# Altium PCB PCB1.PcbDoc
Units mil, origin at the board's own origin, x right, y up, seen from the top; angles counter-clockwise.
Board outline 1440 x 1160 mil, 2 copper layers (Top Layer, Bottom Layer); 43 components, 34 nets, 175 pads, 37 vias.
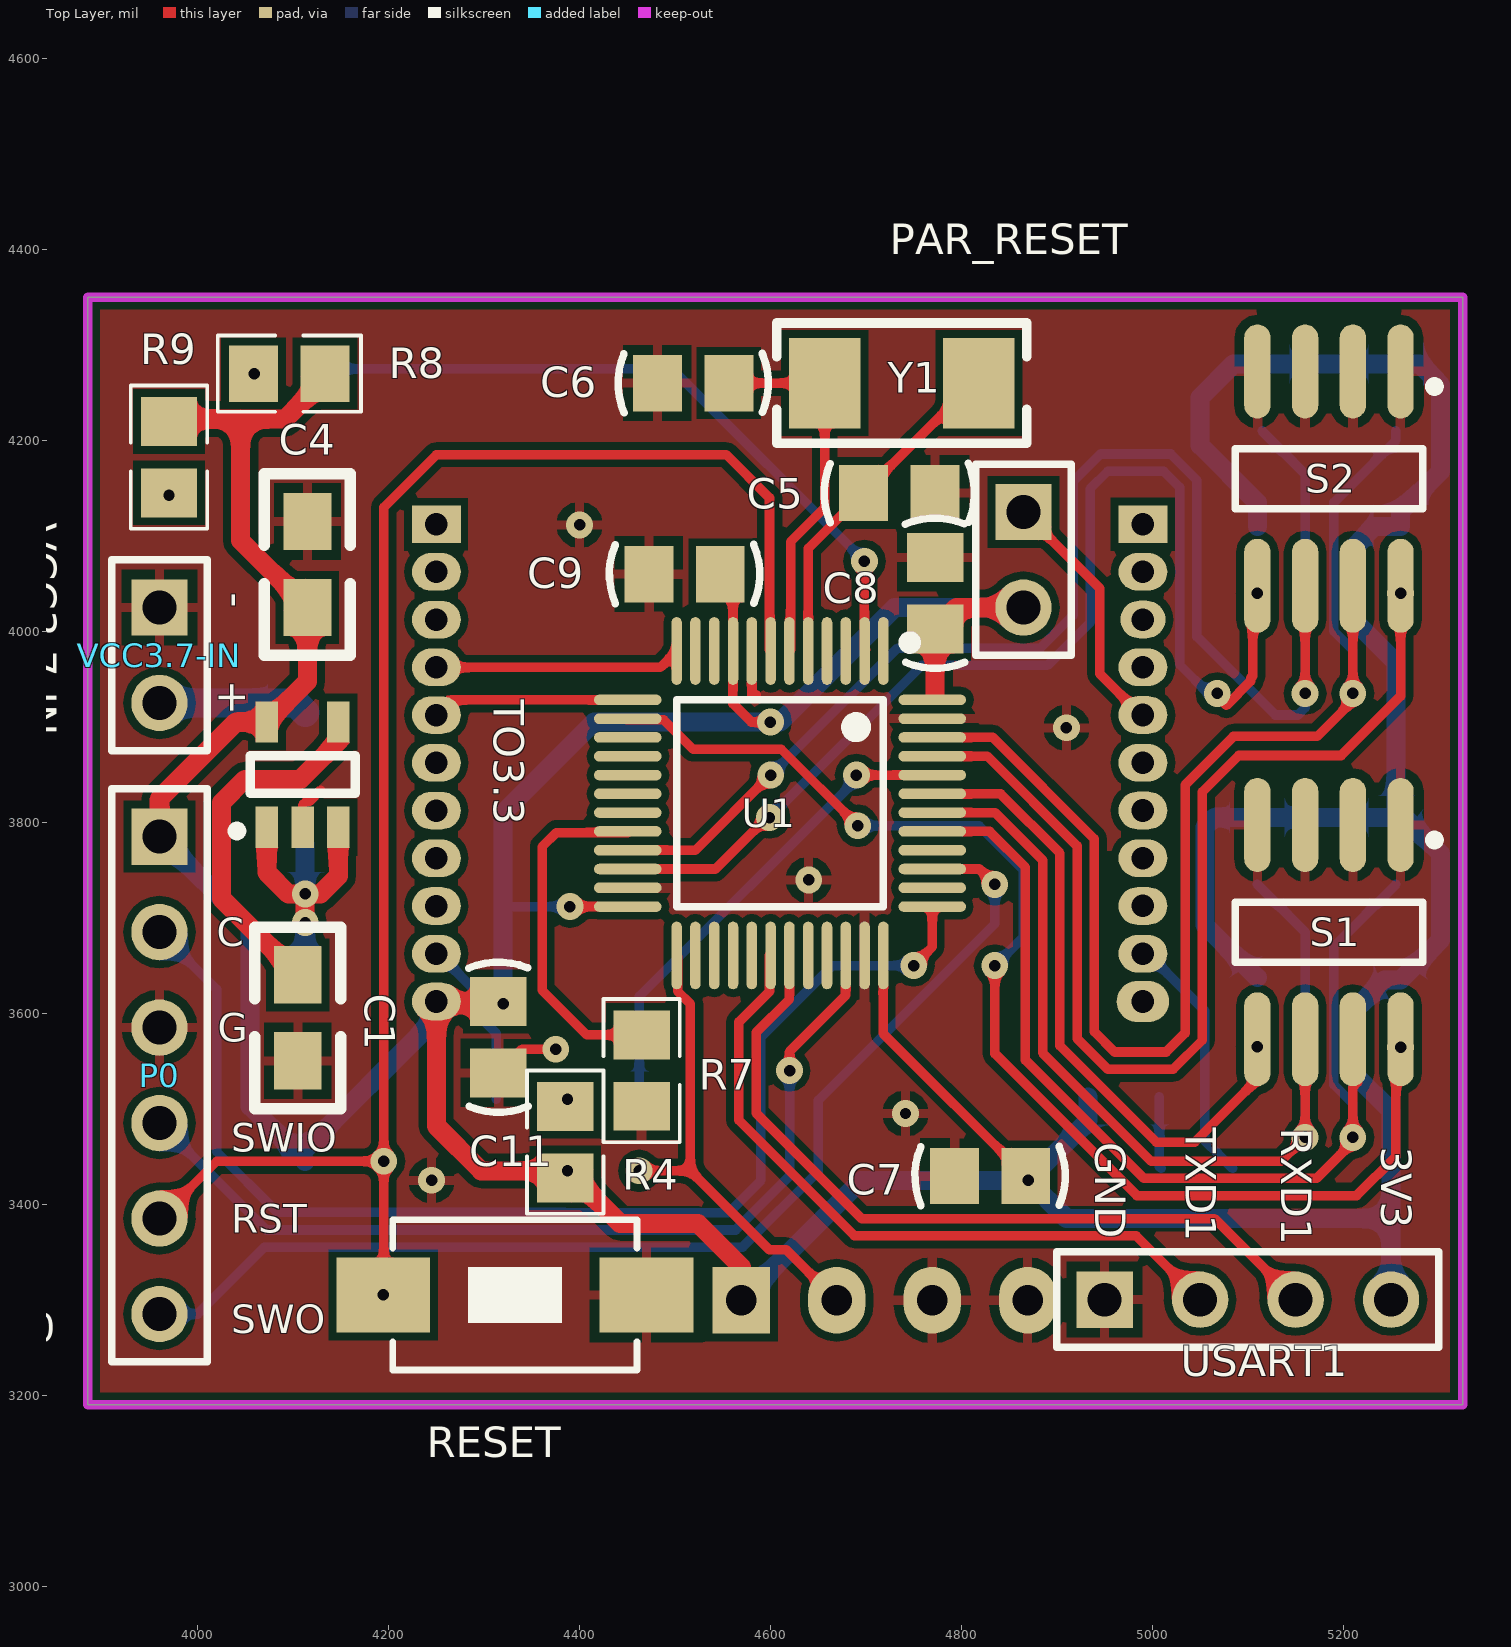
[diagram p0: Top Layer view]
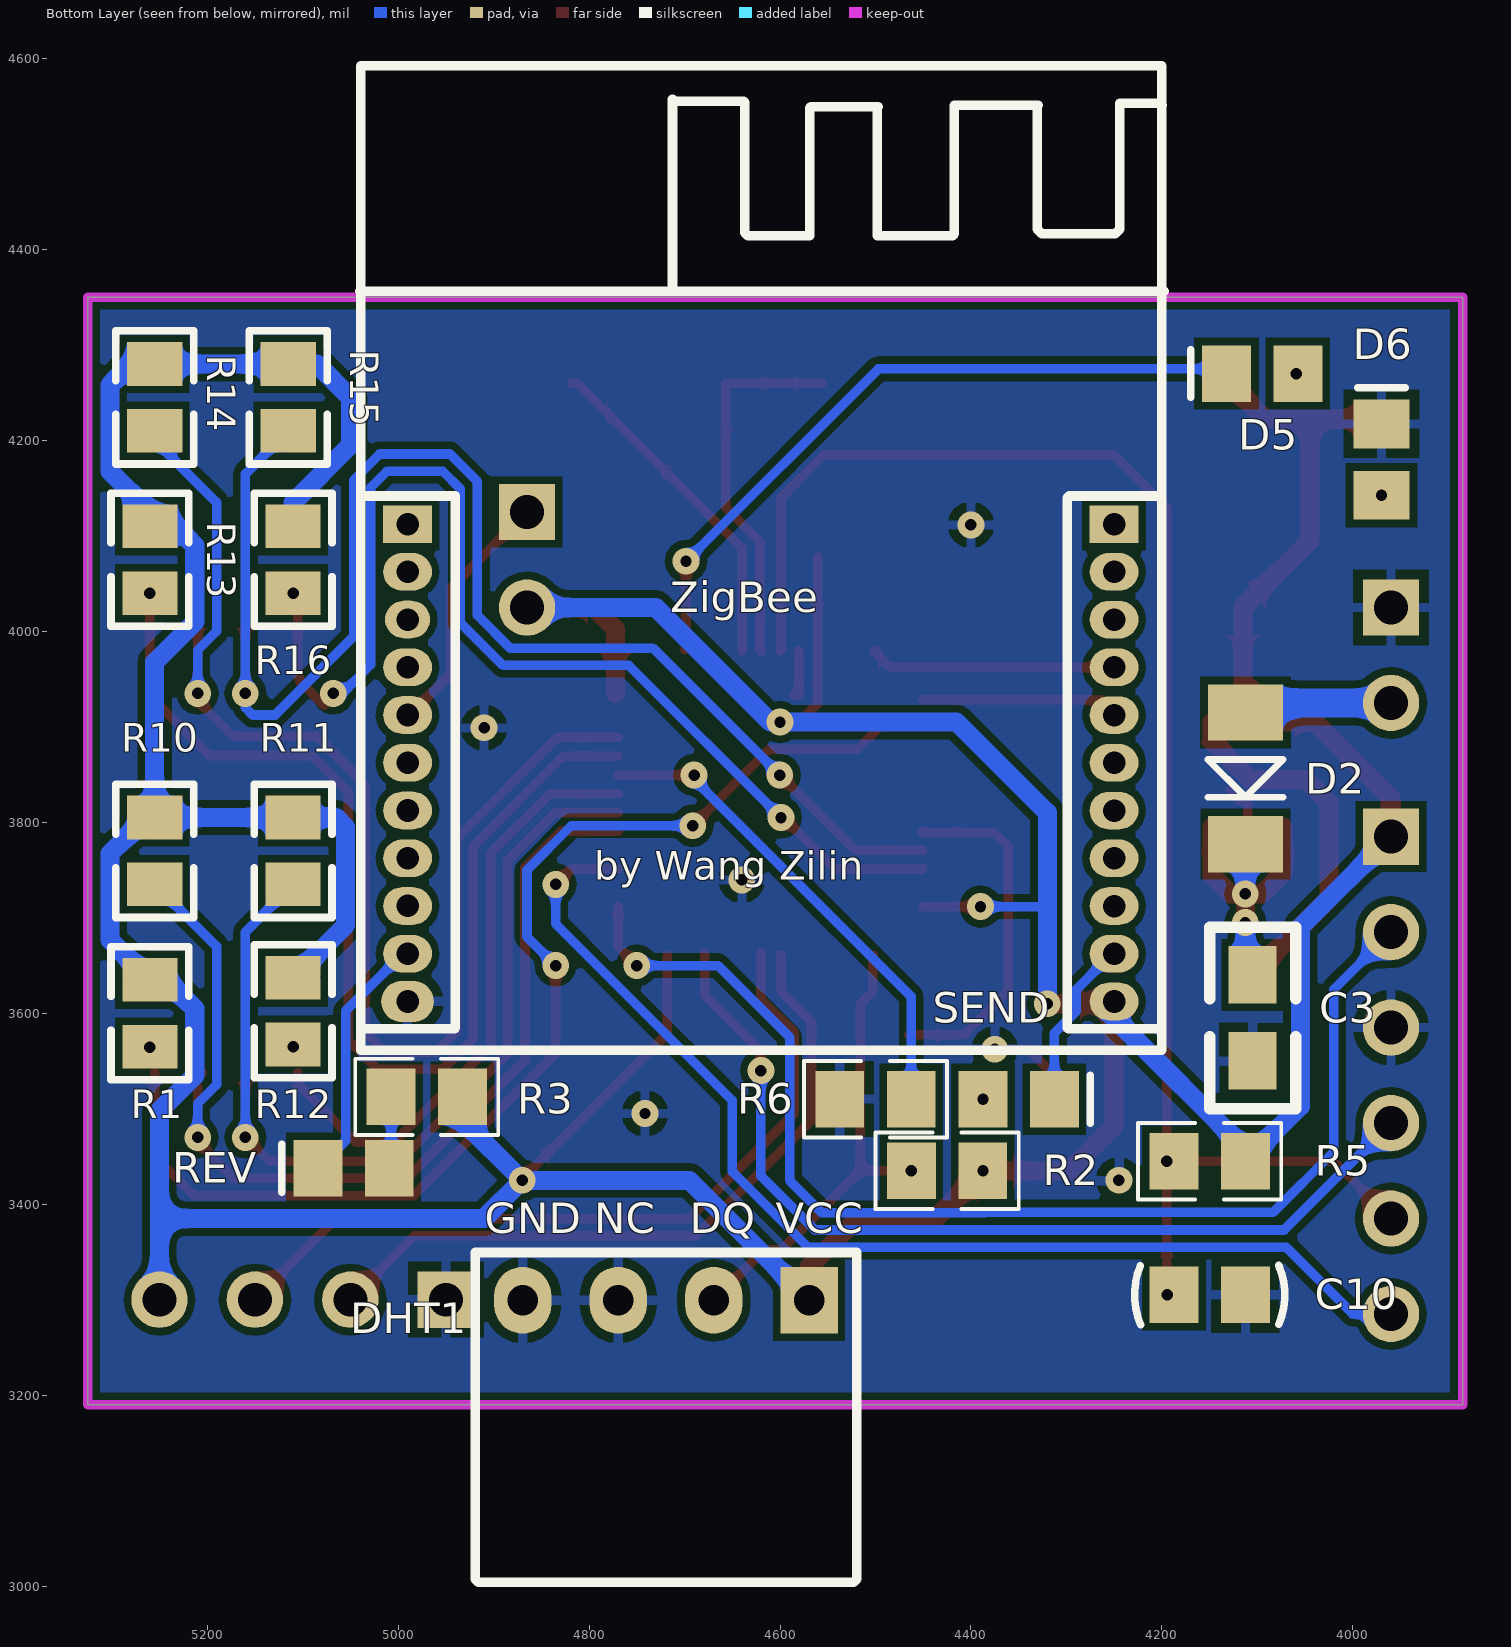
[diagram p1: Bottom Layer view, seen from below]

## Layer stack, top to bottom
Top Solder: solder mask 0.4, Solder Resist, Dk 3.5
Top Layer: signal copper 1.4
Dielectric 1: dielectric 12.6, FR-4, Dk 4.8
Bottom Layer: signal copper 1.4
Bottom Solder: solder mask 0.4, Solder Resist, Dk 3.5

## Board outline
3885,3190 3885,4350 5325,4350 5325,3190

## Design rules (kind name [scope] priority, off if disabled: settings)
Clearance [All] p1: gap=8 ignorepadtopadclearanceinfootprint=TRUE
PolygonConnect [All] p1: connectstyle=Relief reliefconductorwidth=10 reliefentries=4 polygonreliefangle="90 Angle" airgapwidth=10
RoutingVias [All] p1: holewidth=28 width=50 viastyle="Through Hole" minholewidth=28 minwidth=50 maxholewidth=28 maxwidth=50
SolderMaskExpansion [All] p1: expansion=4
Width [All] p1: maxlimit=50 minlimit=10 preferedwidth=10
30 further rules are at their usual default settings.

## Components (designator, comment, footprint, x,y, rotation, side; value= is the part's Value field where it differs from the comment)
C1 "22nF" 0805 4104.94,3550.21 r90 top
C3 "106" 0805 4104.94,3640.21 r270 bottom
C4 "106" 0805 4115.06,4115 r270 top
C5 "Cap" C-RAD-0805 4735,4145 r180 top value=22p
C6 "Cap" C-RAD-0805 4519.02,4260 r0 top value=22p
C7 "Cap" C-RAD-0805 4830,3429.54 r180 top value=104
C8 "Cap" C-RAD-0805 4772.4,4040 r90 top value=104
C9 "Cap" C-RAD-0805 4510,4060 r180 top value=104
C10 "Cap" C-RAD-0805 4150,3305 r180 bottom value=104
C11 "Cap" C-RAD-0805 4315,3575 r270 top value=104
D2 "Diode" DIODE-1206 4112.6,3915 r270 bottom
D5 "LED0" LED_0805 4095,4270 r0 bottom
D6 "LED0" LED_0805 3970,4180 r90 bottom
DHT1 "DHT11" DTH11 4680.08,3260.04 r270 bottom
P0 "Header 6" HDR1X6 3960,3785 r270 top
PAR_RESET "Header 2" HDR2X1_A 4865,4125 r270 top
R1 "10KΩ (1002) ±1%" 0805_R 5260,3600 r90 bottom
R2 "Res1" 0805-1 4425,3435 r0 bottom value=4.7K
R3 "Res1" 0805-1 4970,3512.4 r0 bottom value=10K
R4 "Res1" 0805-1 4385,3465 r270 top value=10K
R5 "Res1" 0805-1 4150,3445 r180 bottom value=10K
R6 "Res1" 0805-1 4500,3510 r0 bottom value=1K
R7 "Res1" 0805-1 4465,3540 r90 top value=1K
R8 "Res1" 0805-1 4095.98,4270 r180 top value=10K
R9 "Res1" 0805-1 3970,4182.48 r270 top value=10K
R10 "10KΩ (1002) ±1%" 0805_R 5255,3770 r90 bottom
R11 "10KΩ (1002) ±1%" 0805_R 5110,3770 r90 bottom
R12 "10KΩ (1002) ±1%" 0805_R 5110,3602.32 r90 bottom
R13 "10KΩ (1002) ±1%" 0805_R 5260,4075 r90 bottom
R14 "10KΩ (1002) ±1%" 0805_R 5255,4245 r90 bottom
R15 "10KΩ (1002) ±1%" 0805_R 5115,4245 r90 bottom
R16 "10KΩ (1002) ±1%" 0805_R 5110,4075 r90 bottom
RESET "SW-PB" SW_PB2_A1 4330,3305 r270 top
REV "LED0" LED_0805 5046.71,3437.6 r0 bottom
S1 "SW DIP-4" SO8_xl 5185,3685 r270 top
S2 "SW DIP-4" SO8_xl 5185,4160 r270 top
SEND "LED0" LED_0805 4350,3510 r180 bottom
TO3.3 "RT9193-33" LC-SOT-23-5 4110,3850 r270 top
U1 "STM32F103C8T6" LQFP-48_7x7x05P 4610,3820 r180 top
USART1 "Header 4" HDR4X1_A 4950,3300 r0 top
VCC3.7-IN "Header 2" HDR2X1_A 3960,4025 r270 top
Y1 "8MHz ±20ppm 20pF" SMD-5032_2P 4737.6,4260 r0 top
ZigBee "ZigBee XL2530-D01" ZigBeeXL2530-D01 4617.12,3560.11 r180 bottom

## Footprints (in the part's own frame and the unit in brackets; to place one, negate y for a bottom-side part, rotate by r counter-clockwise, add the part's x,y. Pads: shape width x height; smd on the part's side, far side on the other; paste and mask are expansions set on the pad)
0805 [mil]
  rect 60x50 smd: 1(0,-0.06) 2(90,-0.06)
  silkscreen extent -50,-45 140,45
0805-1 [mm] "贴片带丝印"
  rect 1.3x1.5 smd: 1(-0.95,0) 2(0.95,0)
  silkscreen extent -1.91,-1.02 1.91,1.02, body extent -1.14,-0.51 1.14,0.51, height 1
0805_R [mm]
  rect 1.16x1.47 smd: 1(-0.89,0) 2(0.89,0)
  silkscreen extent -1.77,-1.04 1.77,1.03, body extent -1,-0.63 1,0.63, height 0.49
C-RAD-0805 [mm] "贴片电容"
  rect 1.3x1.5 smd: 1(-0.95,0) 2(0.95,0)
  silkscreen extent -2,-0.79 2,0.79, body extent -1.27,-0.64 1.27,0.64, height 0.9
DIODE-1206 [mm] "玻璃封装二极管"
  rect 1.5x2 smd: 1(0,0) 2(3.5,0)
  silkscreen extent 1.25,-1 2.25,1
DTH11 [mil]
  rect 70x60 hole 32: 1(-39.37,110.63)
  oval 70x60 hole 32: 2(-39.37,10.63) 3(-39.37,-89.37) 4(-39.37,-189.37)
  silkscreen extent -89,-239 256,161
HDR1X6 [mm] "Connector; Header; 6 Position"
  rect 1.5x1.5 hole 0.9: 1(0,0)
  round 1.5 hole 0.9: 2(2.54,0) 3(5.08,0) 4(7.62,0) 5(10.16,0) 6(12.7,0)
  silkscreen extent -1.27,-1.27 13.97,1.27
HDR2X1_A [mm] "Connector; Header; 2 Position"
  rect 1.5x1.5 hole 0.9: 1(0,0)
  round 1.5 hole 0.9: 2(2.54,0)
  silkscreen extent -1.27,-1.27 3.81,1.27
HDR4X1_A [mm] "Connector; Header; 4 Position"
  rect 1.5x1.5 hole 0.9: 1(0,0)
  round 1.5 hole 0.9: 2(2.54,0) 3(5.08,0) 4(7.62,0)
  silkscreen extent -1.27,-1.27 8.89,1.27
LC-SOT-23-5 [mm]
  rect 1.1x0.6 smd: 1(1.4,-0.95) 2(1.4,0) 3(1.4,0.95) 4(-1.4,0.95) 5(-1.4,-0.95)
  silkscreen extent -0.5,-1.87 1.62,1.4
LED_0805 [mm] "贴片二极管"
  rect 1.3x1.5 smd: 1(-0.95,0) 2(0.95,0)
  silkscreen extent 1.91,-0.64 1.91,0.64
LQFP-48_7x7x05P [mm]
  oval 0.28x1.8 smd mask+0.051: 1(-2.75,-4.05) 2(-2.25,-4.05) 3(-1.75,-4.05) 4(-1.25,-4.05) 5(-0.75,-4.05) 6(-0.25,-4.05) 7(0.25,-4.05) 8(0.75,-4.05) 9(1.25,-4.05) 10(1.75,-4.05) 11(2.25,-4.05) 12(2.75,-4.05) 25(2.75,4.05) 26(2.25,4.05) 27(1.75,4.05) 28(1.25,4.05) 29(0.75,4.05) 30(0.25,4.05) 31(-0.25,4.05) 32(-0.75,4.05) 33(-1.25,4.05) 34(-1.75,4.05) 35(-2.25,4.05) 36(-2.75,4.05)
  oval 1.8x0.28 smd mask+0.051: 13(4.05,-2.75) 14(4.05,-2.25) 15(4.05,-1.75) 16(4.05,-1.25) 17(4.05,-0.75) 18(4.05,-0.25) 19(4.05,0.25) 20(4.05,0.75) 21(4.05,1.25) 22(4.05,1.75) 23(4.05,2.25) 24(4.05,2.75) 37(-4.05,2.75) 38(-4.05,2.25) 39(-4.05,1.75) 40(-4.05,1.25) 41(-4.05,0.75) 42(-4.05,0.25) 43(-4.05,-0.25) 44(-4.05,-0.75) 45(-4.05,-1.25) 46(-4.05,-1.75) 47(-4.05,-2.25) 48(-4.05,-2.75)
  silkscreen extent -3.6,-4.42 2.75,2.75, body extent -4.5,-4.5 4.5,4.5, height 1.6
SMD-5032_2P [mm]
  rect 1.9x2.4 smd: 1(-2.05,0) 2(2.05,0)
  silkscreen extent -3.32,-1.6 3.32,1.6
SO8_xl [mm] "嘉立创买的拨码开关"
  oval 2.5x0.7 smd: 1(-2.85,1.905) 2(-2.85,0.635) 3(-2.85,-0.635) 4(-2.85,-1.905) 5(2.85,-1.905) 6(2.85,-0.635) 7(2.85,0.635) 8(2.85,1.905)
  silkscreen extent -2.57,-2.5 0.8,2.93, body extent -2,-2.5 2,2.5, height 1.75
SW_PB2_A1 [mm]
  rect 2x2.5 smd: 1(0,3.556) 2(0,-3.444)
  silkscreen extent -2,-3.19 2,3.31, body extent -2.03,-3.18 2.03,3.3, height 1.2
ZigBeeXL2530-D01 [mm]
  rect 1.3x1 hole 0.6: 1(9.322,14.028) 22(-9.474,14.028)
  oval 1.3x1 hole 0.6: 2(9.322,12.756) 3(9.322,11.486) 4(9.322,10.216) 5(9.322,8.946) 6(9.322,7.676) 7(9.322,6.406) 8(9.322,5.136) 9(9.322,3.866) 10(9.322,2.596) 11(9.322,1.326) 13(-9.474,2.598) 14(-9.474,3.868) 15(-9.474,5.138) 16(-9.474,6.408) 17(-9.474,7.678) 18(-9.474,8.948) 19(-9.474,10.218) 21(-9.474,12.758)
  oval 1.4x1.1 hole 0.6: 12(-9.474,1.326)
  oval 1.2x1 hole 0.6: 20(-9.474,11.488)
  silkscreen extent -10.75,0.03 10.65,26.22

## Part data
C1 C3 C4: library part C
C5 C6 C7 C8 C9 C10 C11: "无极性电容", LatestRevisionDate=17-Jul-2002, LatestRevisionNote="Re-released for DXP Platform.", PackageReference=RAD-0.3, Published=8-Jun-2000, Publisher="Altium Limited"
D2: "二极管", PackageDocument=Sep-1996, Code_JEDEC=DO-214-AB, LatestRevisionDate=17-Jul-2002, LatestRevisionNote="Re-released for DXP Platform.", PackageReference=SMC, Published=8-Jun-2000, Publisher="Altium Limited", Type=1N4001
D5 D6 REV SEND: "发光二极管", LatestRevisionDate=08-Jul-2005, LatestRevisionNote="Mech Layer 1 removed.", PackageReference=LED-0, Published=8-Jun-2000, Publisher="Altium Limited"
P0: "Header, 6-Pin", LatestRevisionDate=17-Jul-2002, LatestRevisionNote="Re-released for DXP Platform.", Publisher="Altium Limited"
PAR_RESET USART1 VCC3.7-IN: "接插件", LatestRevisionDate=17-Jul-2002, LatestRevisionNote="Re-released for DXP Platform.", Publisher="Altium Limited"
R1 R10 R11 R12 R13 R14 R15 R16: library part "0805 10KΩ (1002) 1%", "贴片电阻", Package=0805, SuppliersPartNumber=C17414, ComponentLink1Description=¹©Ó, ComponentLink1URL=http://www.szlcsc.com/product/details_18102.html, Supplier=LC
R2 R3 R4 R5 R6 R7 R8 R9: "贴片电阻", LatestRevisionDate=17-Jul-2002, LatestRevisionNote="Re-released for DXP Platform.", PackageReference=AXIAL-0.4, Published=8-Jun-2000, Publisher="Altium Limited"
RESET: "微动开关", LatestRevisionDate=17-Jul-2002, LatestRevisionNote="Re-released for DXP Platform.", PackageReference=SPST-2, Published=24-Mar-1999, Publisher="Altium Limited"
S1 S2: "DIP Switch, 4 Position, SPST", Code_IPC=SOIC127P600-8, Code_JEDEC=MS-012-AA, LatestRevisionDate=29-May-2009, LatestRevisionNote="IPC-7351 Footprint Added.", PackageDescription="8-Pin Small Outline Integrated Circuit 1.27 mm Pitch", PackageReference=SO8, PackageVersion=Dec-2002, Published=24-Mar-1999, Publisher="Altium Limited"
U1: "ARM", Package=LQFP-48_7x7x05P, SuppliersPartNumber=C8734, ComponentLink1Description=¹©Ó, ComponentLink1URL=http://www.szlcsc.com/product/details_9243.html, Supplier=LC
Y1: library part "SMD-5032_2P 8MHz 20ppm 20pF", "贴片晶振", Package=SMD-5032_2P, SuppliersPartNumber=C115962, ComponentLink1Description=¹©Ó, ComponentLink1URL=http://www.szlcsc.com/product/details_117214.html, Supplier=LC

## Via types
v1: diameter 28, hole 12, Top Layer to Bottom Layer, 37 vias

## Nets (pads, with @x,y where several pads share a name; then routed paths per layer and width w, separated by ;. In a path a pad name is that pad's centre, name@x,y a point inside that pad or via, vN(x,y) a via of type N, cw(c..) or ccw(c..) an arc to the next point about the centre after c; other vN are vias at no path point)
BOOT0: R6.1 U1.44 | length 513.2
  Top Layer w10: v1(4690,3849.53) U1.44
  Bottom Layer w10: R6.1 4462.6,3617.6 4690,3845 v1(4690,3849.53)
BOOT1: R7.2 U1.20 | length 370.8
  Top Layer w10: U1.20 4450.55,3789.3 4375.76,3789.3 4360.87,3774.41 4360.87,3624.13 4407.6,3577.4 R7.2
GND: C1.1 C3.2 C4.1 C5.1 C6.1 C7.2 C8.2 C9.2 C10.2 C11.2 D6.2 DHT1.3 DHT1.4 P0.3 R6.2 R7.1 RESET.1 S1.1 S1.2 S1.3 S1.4 S2.1 S2.2 S2.3 S2.4 TO3.3.2 U1.8 U1.23 U1.35 U1.47 USART1.1 VCC3.7-IN.1 ZigBee.12 | length 169.4
  Top Layer w10: TO3.3.2 4110,3818.04 4113.96,3822 4117.2,3822 4128.87,3833.67 ; C11.2 4339.79,3562.39 v1(4375,3562.39) ; U1.8 4580.47,3933.71 4585.32,3933.71
  other v1: 4245,3425 4741.42,3495 4640,3739.68 4910,3898.97 4400,4111.49
NetC1_2: C1.2 TO3.3.4 | length 382.8
  Top Layer w20: C1.2 4025,3720.21 4025,3820.47 4049.53,3845 4107.67,3845 4147.4,3884.73 TO3.3.4
NetC3_1: C3.1 D2.2 TO3.3.1 TO3.3.3 | length 330.6
  Top Layer w20: TO3.3.1 4072.6,3747.4 4095,3725 v1(4112.6,3725) ; v1(4112.6,3695) v1(4112.6,3725) ; TO3.3.3 4147.4,3743.82 4128.58,3725 v1(4112.6,3725)
  Bottom Layer w20: C3.1 4112.6,3647.81 v1(4112.6,3695) ; v1(4112.6,3725) D2.2
NetD2_1: D2.1 VCC3.7-IN.2 | length 151.7
  Bottom Layer w30: VCC3.7-IN.2@3965,3925 4102.6,3925 D2.1
NetD5_1: D5.1 R8.2
  other v1: 4059.37,4270
NetD6_1: D6.1 R9.2
  other v1: 3970,4142.6
NetPAR_RESET_1: PAR_RESET.1 ZigBee.18 | length 265.7
  Top Layer w10: PAR_RESET.1 4945,4045 4945,3955.39 4987.99,3912.4 ZigBee.18
NetR3_2: R3.2 REV.1 | length 75.6
  Bottom Layer w10: R3.2 5007.4,3439.5 REV.1
NetR4_1: R4.1 SEND.1
  other v1: 4387.4,3510
NetREV_2: REV.2 ZigBee.13 | length 271.4
  Bottom Layer w10: ZigBee.13@4985.28,3662.4 ZigBee.13 4994.95,3662.4 5055,3602.36 5055,3466.71 REV.2
NetSEND_2: SEND.2 ZigBee.10 | length 179.5
  Bottom Layer w10: ZigBee.10 4252.25,3662.33 4289.49,3625.08 4289.49,3602.32 4312.6,3579.22 SEND.2
OSC_IN: C5.2 U1.5 Y1.2 | length 357.9
  Top Layer w10: U1.5 4639.53,4086.93 C5.2 4812.6,4260 Y1.2
OSC_OUT: C6.2 U1.6 Y1.1 | length 396.4
  Top Layer w10: C6.2 Y1.1 4656.89,4129.75 4621.02,4093.87 4621.02,3980.62 U1.6
PA4: R1.1 S1.8 U1.14 | length 1272.9
  Top Layer w10: U1.14@4449.38,3907.41 U1.14 4451.72,3907.41 4488.14,3907.41 4519.02,3876.53 4611.34,3876.53 v1(4691.48,3796.39) ; v1(4835,3650) 4835,3557.72 4983.72,3409 5214,3409 5255,3450 S1.8@5255,3537.8
  Bottom Layer w10: v1(4691.48,3796.39) 4818.61,3796.39 4865,3750 4865,3680 v1(4835,3650)
  other v1: 5260,3564.52
PB5: R10.1 S1.7 U1.41 | length 1104.2
  Top Layer w10: U1.41 4829.53,3790.47 4867.1,3752.9 4867.1,3551.08 4991.18,3427 5172,3427 5210,3465 v1(5210,3470) 5210,3522.8 5215,3527.8 S1.7@5205,3537.8
  Bottom Layer w10: v1(5210,3470) 5210,3505.21 5190.06,3525.14 5190.06,3670.02 R10.1
PB6: R11.1 S1.6 U1.42 | length 1028.9
  Top Layer w10: U1.42 4835.3,3810.16 4885.1,3760.36 4885.1,3558.54 4998.63,3445 5135,3445 v1(5160,3470) S1.6@5160,3542.8
  Bottom Layer w10: R11.1 5160,3684.96 v1(5160,3470)
PB7: R12.1 S1.5 U1.43 | length 642.2
  Top Layer w10: U1.43 4841.07,3829.84 4903.1,3767.82 4903.1,3565.99 5004.09,3465 5044.36,3465 5105,3525.64 S1.5@5105,3537.8
  other v1: 5110,3565
PB8: R13.1 S2.8 U1.45 | length 1169.2
  Top Layer w10: U1.45 4827.15,3869.21 4921.1,3775.27 4921.1,3573.45 4953.1,3541.45 5021.9,3541.45 5052.22,3571.76 5052.22,3831.76 5090.46,3870 5197.67,3870 5260,3932.33 v1(5260,4039.96) S2.8@5260,4042.8
PB9: R14.1 S2.7 U1.46 | length 1425.5
  Top Layer w10: U1.46 4832.93,3888.9 4939.1,3782.73 4939.1,3580.9 4960.55,3559.45 5014.45,3559.45 5034.22,3579.22 5034.22,3839.22 5085,3890 5172.67,3890 5210,3927.33 v1(5210,3935) S2.7@5210,4042.8
  Bottom Layer w10: v1(5210,3935) 5210,3980.21 5190.06,4000.14 5190.06,4135.06 5255,4200 R14.1
PB10: R15.1 S2.6 U1.21 | length 1592.2
  Top Layer w10: U1.21 4521.42,3770.79 v1(4600.16,3849.53) ; v1(5160,3935) S2.6@5160,4042.8
  Bottom Layer w10: v1(4600.16,3849.53) 4733.1,3982.47 4882.62,3982.47 4917,4016.86 4917,4157 4945.77,4185.77 5019.23,4185.77 5046.71,4158.29 5046.71,3994.48 5128.78,3912.4 5152.4,3912.4 5160,3920 v1(5160,3935) 5160,4165 R15.1
PB11: R16.1 S2.5 U1.22 | length 1225.7
  Top Layer w10: U1.22 4542.36,3751.1 4596.26,3805 v1(4598.98,3805) ; v1(5068,3935) 5068,3932 5077.58,3922.42 5103,3947.83 5103,3951.18 5105,3953.18 S2.5@5105,4042.8
  Bottom Layer w10: v1(4598.98,3805) 4758.46,3964.47 4890.07,3964.47 4935,4009.4 4935,4149.54 4953.23,4167.77 5011.77,4167.77 5028.71,4150.84 5028.71,3965 5058.71,3935 v1(5068,3935)
  other v1: 5110,4039.96
PB12: DHT1.2 R2.2 U1.25 | length 512.4
  Top Layer w10: v1(4462.4,3435) 4516.14,3435 ; U1.25 4502.91,3659.38 4502.91,3622.96 4516.14,3609.73 4516.14,3435 ; DHT1.2@4651.73,3299.41 DHT1.2 4616.7,3352.16 4598.98,3352.16 4516.14,3435
PC13: D5.2 U1.2 | length 734.2
  Top Layer w10: v1(4698.46,4073.46) 4698.46,3982.05 U1.2@4699.64,3980.87
  Bottom Layer w10: D5.2@4140.79,4275 4496.93,4275 v1(4698.46,4073.46)
RESET: C10.1 P0.5 R5.1 RESET.2 U1.7 | length 1702.7
  Top Layer w10: P0.5 4020,3445 v1(4195,3445) ; v1(4194.41,3305) 4194.41,3300 4195,3299.41 v1(4195,3445) ; U1.7 4598.98,3980.62 4598.98,4139.88 4553.87,4185 4250,4185 4195,4130 v1(4195,3445)
RX1: U1.31 USART1.3 | length 828
  Top Layer w10: U1.31@4619.72,3663.15 4619.72,3614.57 4585,3579.84 4585,3495.46 4695.46,3385 5065,3385 USART1.3
RX2: U1.13 ZigBee.5 | length 207
  Top Layer w10: ZigBee.5 4266.06,3928.27 U1.13
SWCLK: P0.2 U1.37 | length 1279.4
  Top Layer w10: v1@4745.31,3647.81 v1@4747.5,3650 ; v1(4750,3650) 4769.45,3669.45 U1.37
  Bottom Layer w10: P0.2 4020,3625 4020,3455 4083.26,3391.74 4384.29,3391.74 4385.03,3391 4556,3391 4590,3425 4590,3575 4665,3650 v1(4750,3650)
SWIO: P0.4 U1.34 | length 987.8
  Top Layer w10: v1(4620,3540) 4620,3560 4678.78,3618.78 U1.34@4678.78,3663.15
  Bottom Layer w10: P0.4 4072,3373 4563.46,3373 4620,3429.54 v1(4620,3540)
SWO: P0.6 U1.39 | length 1201.5
  Top Layer w10: U1.39 4818.9,3751.1 v1(4835,3735)
  Bottom Layer w10: P0.6 4000,3285 4070,3355 4570.91,3355 4650,3434.09 4650,3508.78 4835,3693.78 v1(4835,3735)
TX1: U1.30 USART1.2 | length 747.8
  Top Layer w10: U1.30 4598.98,3660.55 4598.98,3622.96 4567,3590.98 4567,3488 4688,3367 4983,3367 USART1.2
TX2: U1.12 ZigBee.4 | length 258.7
  Top Layer w10: ZigBee.4 4484.61,3962.33 U1.12
VCC3.3: C4.2 C7.1 C8.1 C9.1 C11.1 DHT1.1 P0.1 PAR_RESET.2 R1.2 R2.1 R3.1 R4.2 R5.2 R8.1 R9.1 R10.2 R11.2 R12.2 R13.2 R14.2 R15.2 R16.2 TO3.3.5 U1.9 U1.24 U1.36 U1.48 USART1.4 ZigBee.11 | length 6415.9
  Top Layer w10: v1(4390,3711.73) U1.24 ; C9.1@4560.67,4078.07 4560.67,3924.33 4580,3905 v1(4600,3905) ; U1.36 4718,3660.28 4718,3578.95 C7.1
  Top Layer w20: P0.1 3960,3825 4040.12,3905.12 TO3.3.5 4115,3947.52 C4.2 4045,4095 4045,4222.47 ; R9.1 3970,4222.47 4045,4222.47 ; R8.1 4133.38,4264.23 4091.63,4222.47 4045,4222.47 ; v1(4320,3610) 4252.44,3610 ZigBee.11 4250.12,3481.88 4297,3435 v1(4387.4,3435) 4442.4,3380 4523.87,3380 4569.45,3334.42 DHT1.1 ; 4772.4,3935.05 C8.1 4794.8,4025 PAR_RESET.2
  Bottom Layer w10: 4320,3715 4323.27,3711.73 v1(4390,3711.73)
  Bottom Layer w20: P0.1 4055,3690 4055,3502.6 R5.2@4106.3,3451.3 ; R5.2 R5.2@4106.3,3451.3 ; ZigBee.11 4250.12,3595.12 R5.2@4106.3,3451.3 ; v1(4320,3610) 4320,3715 4320,3810 4415,3905 v1(4600,3905) 4610,3905 4730,4025 PAR_RESET.2 PAR_RESET.2@4875,4025 ; DHT1.1 4695,3425 v1(4870,3425) ; R3.1 4932.6,3487.6 v1(4870,3425) ; R12.2 5055,3692.36 5055,3795 5065.04,3805.04 R11.2 R10.2 ; R16.2 5110,4135 5050,4195 5050,4245 5085.04,4280.04 R15.2 R14.2 5279.96,4280.04 5301.94,4258.06 5301.94,4167.77 5260,4125.84 R13.2 5233.1,4110.04 5213.06,4090 5213.06,4009.67 5255,3967.73 R10.2 ; USART1.4 5250,3385 ; v1(4870,3425) 4910,3385 5250,3385 ; 5250,3385 5250,3497.73 5213.06,3534.67 5213.06,3605 5243.1,3635.04 R1.2 5301.94,3676.98 5301.94,3767.19 5264.09,3805.04 R10.2
pads on no net: U1.1 U1.3 U1.4 U1.10 U1.11 U1.15 U1.16 U1.17 U1.18 U1.19 U1.26 U1.27 U1.28 U1.29 U1.32 U1.33 U1.38 U1.40 ZigBee.1 ZigBee.2 ZigBee.3 ZigBee.6 ZigBee.7 ZigBee.8 ZigBee.9 ZigBee.14 ZigBee.15 ZigBee.16 ZigBee.17 ZigBee.19 ZigBee.20 ZigBee.21 ZigBee.22

## Polygon pours and split planes (outlines as drawn)
GND on Top Layer "GND_L01_P008" (solid, pour order 8): 3890,4345 3895,4350 5325,4350 5325,3205 5320,3200 3885,3200
GND on Bottom Layer "GND_L02_P010" (solid, pour order 10): 3885,4350 5315,4350 5325,4340 5325,3190 3905,3190 3895,3200

## Keep-outs
Keep-Out Layer:
  the board outline again, w10

## Silkscreen, mask and mechanical layers (free items; w line width, h text height)
Top Overlay:
  text "-" at 4050,4025 h32 r90
  text "+" at 4050,3912.33 h32 r90
  text "C" at 4020,3670 h30
  text "G" at 4020.98,3570 h30
  text "TXD1" at 5035,3480 h32 r270
  text "RXD1" at 5135,3480 h32 r270
  text "GND" at 4940,3465 h32 r270
  text "3V3" at 5240,3460 h32 r270
  text "SWIO" at 4035,3455 h30
  text "RST" at 4035,3370 h30
  text "SWO" at 4035,3265 h30
Bottom Overlay:
  text "by Wang Zilin" at 4794.45,3740 h30

## Text inside footprints (layer, text, board x,y; h text height)
DHT1: Bottom Overlay "GND" at 4909.45,3369.41 h32; Bottom Overlay "NC" at 4794.45,3369.41 h32; Bottom Overlay "DQ" at 4694.45,3369.41 h32; Bottom Overlay "VCC" at 4604.45,3369.41 h32